# EAGLE board ssslidar_v0.1_blade_SIG (EAGLE 7.6.0)
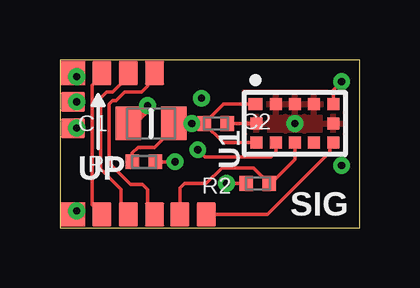
[diagram p0: board, top side]
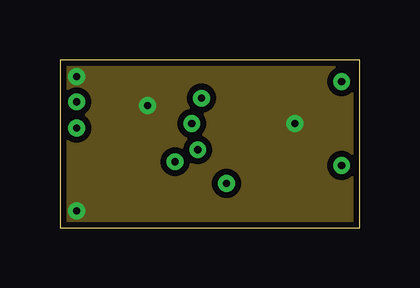
[diagram p1: board, inner layer Route2]
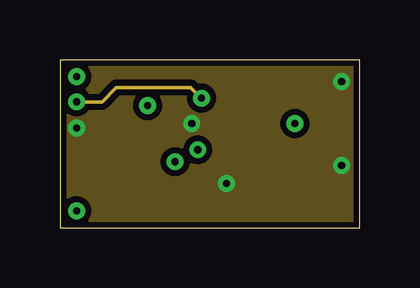
[diagram p2: board, inner layer Route3]
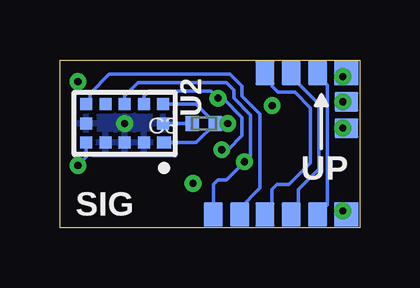
[diagram p3: board, bottom side, seen from below]

Size 12.5 x 7 mm. Coordinates in mm from the lower left corner, seen from the top.
Outline: 0,0 12.5,0 12.5,7 0,7 0,0
Copper layers (1*2*3*16): Top 0.035mm / dielectric 0.15mm / Route2 0.035mm / dielectric 1.1mm / Route3 0.035mm / dielectric 0.15mm / Bottom 0.035mm
Design rules "Xevelabs_6mil_4layers_eurocircuits": minimum track width 0.15mm, minimum drill 0.25mm, track to track 0.155mm, track to pad 0.155mm, pad to pad 0.155mm, via to via 0.155mm, smd to smd 0mil, copper to edge 0.25mm, drill to drill 0.25mm, minimum pad ring 0.15mm, minimum via ring 0.2mm, stop-mask expansion 0mil, vias tented up to drill 100mil, thermal gap 0.2mm

## Footprints (pad centres in the part's own frame; a part is rotated, then mirrored left to right if it is on the bottom)
0805_N = smd 1.05 x 1.4: 1 -0.95,0; 2 0.95,0
0402_N = smd 0.57 x 0.62: 1 -0.48,0; 2 0.48,0
PIN_SMD_0.8X1_RECT = smd 1 x 0.8: PIN 0,0
PIN_SMD_1X1_RECT = smd 1 x 1: PIN 0,0
VL53L0X = smd 0.5 x 0.58: 1 0.8,1.64 | smd 0.5 x 0.5: 2 0.8,0.8; 3 0.8,0; 4 0.8,-0.8; 5 0.8,-1.6; 6 0,-1.6; 7 -0.8,-1.6; 8 -0.8,-0.8; 9 -0.8,0; 10 -0.8,0.8; 11 -0.8,1.6; 12 0,1.6

## Placement (x,y rotation side)
C1  10uF  [0805_N]  3.8,4.35 180 top
C2  100nF  [0402_N]  6.5,4.35 0 top
C3  100nF  [0402_N]  6.5,4.35 180 bottom
P1  PIN_SMD_0.8X1_RECT  [PIN_SMD_0.8X1_RECT]  3.95,6.45 270 bottom
P2  PIN_SMD_1X1_RECT  [PIN_SMD_1X1_RECT]  0.55,6.45 90 bottom
P3  PIN_SMD_0.8X1_RECT  [PIN_SMD_0.8X1_RECT]  1.75,6.45 270 bottom
P4  PIN_SMD_0.8X1_RECT  [PIN_SMD_0.8X1_RECT]  5,0.55 90 top
P5  PIN_SMD_0.8X1_RECT  [PIN_SMD_0.8X1_RECT]  6.1,0.55 90 bottom
P6  PIN_SMD_0.8X1_RECT  [PIN_SMD_0.8X1_RECT]  6.1,0.55 90 top
P7  PIN_SMD_0.8X1_RECT  [PIN_SMD_0.8X1_RECT]  5,0.55 90 bottom
P8  PIN_SMD_0.8X1_RECT  [PIN_SMD_0.8X1_RECT]  2.85,0.55 270 bottom
P9  PIN_SMD_1X1_RECT  [PIN_SMD_1X1_RECT]  0.55,6.45 0 top
P10  PIN_SMD_0.8X1_RECT  [PIN_SMD_0.8X1_RECT]  0.55,5.25 180 bottom
P11  PIN_SMD_1X1_RECT  [PIN_SMD_1X1_RECT]  0.55,0.55 0 top
P12  PIN_SMD_0.8X1_RECT  [PIN_SMD_0.8X1_RECT]  0.55,5.25 0 top
P13  PIN_SMD_0.8X1_RECT  [PIN_SMD_0.8X1_RECT]  0.55,4.15 0 bottom
P14  PIN_SMD_0.8X1_RECT  [PIN_SMD_0.8X1_RECT]  1.75,6.45 90 top
P15  PIN_SMD_0.8X1_RECT  [PIN_SMD_0.8X1_RECT]  2.85,0.55 90 top
P16  PIN_SMD_0.8X1_RECT  [PIN_SMD_0.8X1_RECT]  0.55,4.15 180 top
P17  PIN_SMD_1X1_RECT  [PIN_SMD_1X1_RECT]  0.55,0.55 90 bottom
P18  PIN_SMD_0.8X1_RECT  [PIN_SMD_0.8X1_RECT]  3.95,0.55 270 bottom
P19  PIN_SMD_0.8X1_RECT  [PIN_SMD_0.8X1_RECT]  3.95,0.55 90 top
P20  PIN_SMD_0.8X1_RECT  [PIN_SMD_0.8X1_RECT]  1.75,0.55 90 top
P21  PIN_SMD_0.8X1_RECT  [PIN_SMD_0.8X1_RECT]  2.85,6.45 90 top
P22  PIN_SMD_0.8X1_RECT  [PIN_SMD_0.8X1_RECT]  3.95,6.45 90 top
P23  PIN_SMD_0.8X1_RECT  [PIN_SMD_0.8X1_RECT]  1.75,0.55 270 bottom
P24  PIN_SMD_0.8X1_RECT  [PIN_SMD_0.8X1_RECT]  2.85,6.45 270 bottom
R1  2k  [0402_N]  3.5,2.75 180 top
R2  2k  [0402_N]  8.25,1.85 180 top
U1  VL53L0X  [VL53L0X]  9.8,4.35 90 top
U2  VL53L0X  [VL53L0X]  9.8,4.35 270 bottom

## Library data of the parts
C1-C3 P1-P24 R1 R2 = Xevelabs
U1 U2 = VL53L0X

## Nets
GND: C1.2 C2.2 C3.2 P2.PIN P9.PIN P11.PIN P17.PIN U1.2 U1.3 U1.4 U1.6 U1.12 U2.2 U2.3 U2.4 U2.6 U2.12
INT1: P6.PIN U1.7
INT2: P7.PIN U2.7
N$1: P14.PIN P20.PIN
N$2: P15.PIN P21.PIN
N$3: P19.PIN P22.PIN
N$4: P1.PIN P18.PIN
N$5: P3.PIN P23.PIN
N$6: P8.PIN P24.PIN
SCL: P10.PIN P12.PIN U1.10 U2.10
SDA1: P4.PIN R2.1 U1.9
SDA2: P5.PIN R1.1 U2.9
VDD: C1.1 C2.1 C3.1 P13.PIN P16.PIN R1.2 R2.2 U1.1 U1.5 U1.11 U2.1 U2.5 U2.11

## Tracks (layer width: path | path; a pad name or v marks a point on that pad's centre or on a via)
GND  (via drill 0.3)
  Top 0.15: v0.7,0.7 P11.PIN | v0.7,6.3 P9.PIN | C3.2 U2.12
  Top 0.5: v3.65,5.1 2.9,4.35 C1.2
  Bottom 0.15: v0.7,0.7 P11.PIN | P9.PIN v0.7,6.3 | U2.12 C3.2
  other vias: 9.8,4.35
  pour Route2 (isolate 0.254): 0.05,6.95 12.45,6.95 12.45,0.05 0.05,0.05
  pour Bottom: 7.65,5.7 11.95,5.7 11.95,3 7.65,3
  pour Top: 7.65,5.7 11.95,5.7 11.95,3 7.65,3
INT1
  Top 0.15: U1.7 11.4,3.45 11.25,3.3 11.25,3.15 8.65,0.55 P6.PIN
INT2
  Bottom 0.15: U2.7 11.25,5.3 11.25,5.6 10.45,6.4 5.4,6.4 4.9,5.9 4.9,5.5 4.15,4.75 4.15,1.65 5,0.8 P7.PIN
N$1
  Top 0.15: P20.PIN 1.35,0.95 1.35,5.95 1.75,6.35 P14.PIN
N$2
  Top 0.15: P15.PIN 2.55,0.85 2.55,1.6 1.7,2.45 1.7,5.4 1.95,5.65 2.2,5.65 2.85,6.3 P21.PIN
N$3
  Top 0.15: P19.PIN 3.65,0.85 3.65,1.6 3.45,1.8 2.95,1.8 2.05,2.7 2.05,5.15 2.2,5.3 2.35,5.3 2.7,5.65 3.4,5.65 3.65,5.9 3.65,6.05 3.95,6.35 P22.PIN
N$4
  Bottom 0.15: P1.PIN 3.65,6.15 3.65,5.9 3.4,5.65 2.7,5.65 2.05,5 2.05,2.7 2.95,1.8 3.45,1.8 3.65,1.6 3.65,1 3.95,0.7 P18.PIN
N$5
  Bottom 0.15: P23.PIN 1.35,0.95 1.35,5.95 1.75,6.35 P3.PIN
N$6
  Bottom 0.15: P8.PIN 2.55,0.85 2.55,1.6 1.7,2.45 1.7,5.15 2.85,6.3 P24.PIN
SCL  (via drill 0.3)
  Top 0.15: P12.PIN v0.7,5.25 | U1.10 9,3.15 8.8,2.95 6.05,2.95 v5.75,3.25
  Route3 0.15: v0.7,5.25 1.75,5.25 2.35,5.85 5.45,5.85 v5.9,5.4
  Bottom 0.15: v0.7,5.25 P12.PIN | U2.10 9,5.5 8.8,5.7 6.2,5.7 v5.9,5.4 5.7,5.4 4.9,4.6 4.9,3.85 5.5,3.25 v5.75,3.25
SDA1
  Top 0.15: 5.3,0.85 P4.PIN 5,1.65 5.2,1.85 6.1,1.85 6.75,2.5 8.08,2.5 R2.1 8.8,1.85 9.8,2.85 U1.9
SDA2  (via drill 0.3)
  Top 0.15: v4.8,2.75 R1.1
  Bottom 0.15: U2.9 9.8,5.5 9.25,6.05 5.55,6.05 5.25,5.75 5.25,5.4 4.55,4.7 4.55,3 v4.8,2.75 5.55,2 5.9,2 6.1,1.8 P5.PIN 6.1,0.7
VDD  (via drill 0.3)
  Top 0.15: v0.7,4.15 P13.PIN | U1.5 11.4,5.75 v11.75,6.1 | R2.2 v6.95,1.85 | C3.1 v5.5,4.35 | U1.11 6.82,3.55 C3.1 | C3.1 6.82,5.15 U1.1 U2.11 | R1.2 3.02,3.12 3.25,3.35 3.95,3.35 4.75,4.15 C1.1
  Top 0.5: v5.5,4.35 C1.1
  Bottom 0.15: v0.7,4.15 P13.PIN | U2.5 11.4,2.95 v11.75,2.6 | U2.11 6.82,5.15 C3.1 | U2.1 6.82,3.55 C3.1 | v5.5,4.35 C3.1
  pour Route3 (isolate 0.254): 0.05,6.95 12.45,6.95 12.45,0.05 0.05,0.05

## Text on the board
tPlace: UP | SIG
bPlace: UP | SIG